# EAGLE board 16x1 8x2 active adapter (EAGLE 4.16)
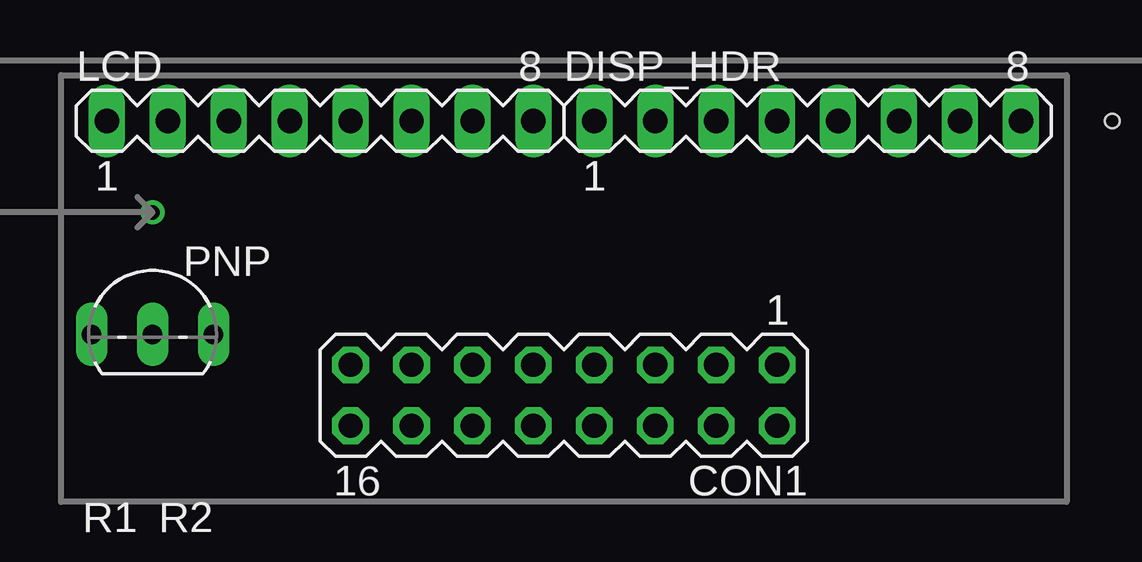
[diagram p0: board, top side]
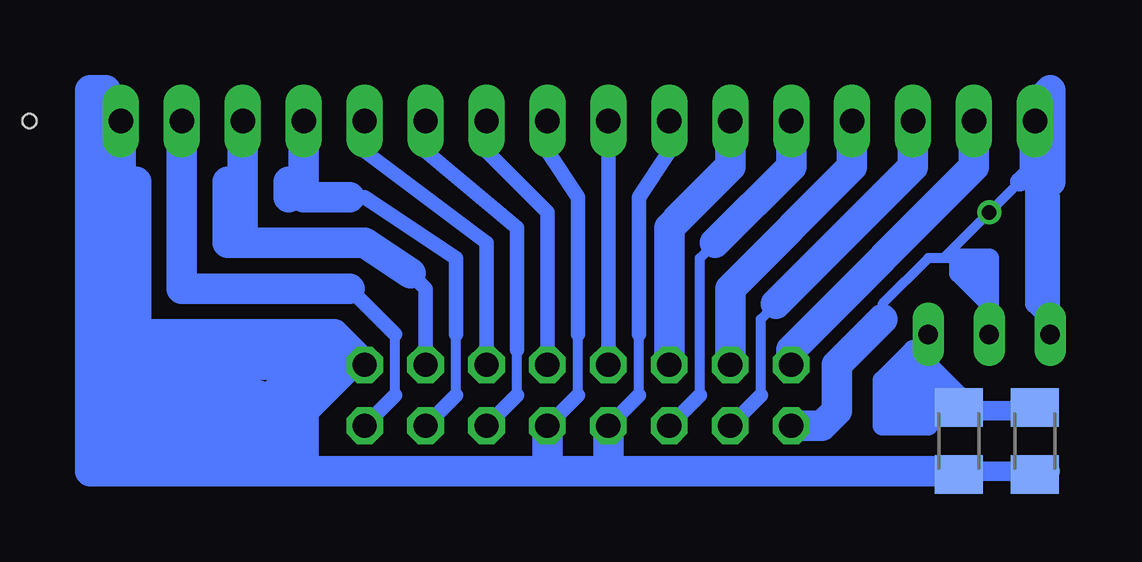
[diagram p1: board, bottom side, seen from below]

No outline drawn. Coordinates in mm, seen from the top.
Copper layers (1*16): Top 0.035mm / dielectric 1.5mm / Bottom 0.035mm
Design rules "default": minimum track width 10mil, minimum drill 24mil, track to track 32mil, track to pad 32mil, pad to pad 32mil, via to via 32mil, smd to smd 32mil, copper to edge 40mil, drill to drill 8mil, minimum pad ring 10mil, minimum via ring 8mil, stop-mask expansion 4mil, vias tented up to drill 0mil, thermal gap 10mil
Holes 0.6 mm at -19.05,48.26 -19.05,21.59 58.42,48.26 58.42,21.59

## Footprints (pad centres in the part's own frame; a part is rotated, then mirrored left to right if it is on the bottom)
MA08-2 = drill 1.016 octagon: 1 -8.89,-1.27; 2 -8.89,1.27; 3 -6.35,-1.27; 4 -6.35,1.27; 5 -3.81,-1.27; 6 -3.81,1.27; 7 -1.27,-1.27; 8 -1.27,1.27; 9 1.27,-1.27; 10 1.27,1.27; 11 3.81,-1.27; 12 3.81,1.27; 13 6.35,-1.27; 14 6.35,1.27; 15 8.89,-1.27; 16 8.89,1.27
MA08-1 = drill 1.016 long: 1 -8.89,0; 2 -6.35,0; 3 -3.81,0; 4 -1.27,0; 5 1.27,0; 6 3.81,0; 7 6.35,0; 8 8.89,0
TO92- = drill 0.813 long: 1 2.54,-1.27; 2 0,-1.27; 3 -2.54,-1.27
M1206 = smd 1.6 x 2: 1 -1.4,0; 2 1.4,0

## Placement (x,y rotation side)
CON1  [MA08-2]  35.56,36.83 180 top
DISP_HDR  [MA08-1]  45.72,48.26 0 top
LCD  [MA08-1]  25.4,48.26 0 top
PNP  E B C  [TO92-]  18.41,40.64 0 top
R1  91  [M1206]  16.51,34.92 270 bottom
R2  91  [M1206]  19.68,34.92 90 bottom

## Library data of the parts
CON1 DISP_HDR LCD = con-lstb
PNP = transistor-pnp
R1 R2 = rcl

## Nets
S$5: PNP.3
S$10: LCD.1 PNP.2
S$18: PNP.1

## Tracks (layer width: path | path; a pad name or v marks a point on that pad's centre or on a via)
S$1
  Bottom 0.406: 35.56,36.83 35.56,39.37 | 33.02,36.83 33.02,39.37
  Bottom 0.61: 35.56,39.37 35.56,45.09 36.83,46.99 36.83,48.26 | 36.83,35.56 35.56,36.83 | 31.75,48.26 31.75,46.99 33.02,45.09 33.02,39.37 | 34.29,35.56 33.02,36.83
  Bottom 0.813: 19.68,33.66 15.88,33.66
  Bottom 1.27: 54.61,48.26 54.61,39.37 45.72,39.37 44.45,38.1 45.09,38.1 46.99,36.2 46.99,33.66 | 36.83,33.66 46.99,33.66 | 34.29,33.66 36.83,33.66 | 34.29,33.66 34.29,35.56 | 46.99,33.66 55.88,33.66 55.88,49.53 55.24,49.53 55.24,38.1 46.99,38.1 | 46.99,38.1 46.35,38.1 | 46.99,38.1 48.26,36.83 48.26,34.29 47.62,34.29 47.62,36.83 45.72,38.73 | 19.68,33.66 34.29,33.66 | 36.83,33.66 36.83,35.56
S$2
  Bottom 0.406: 43.18,36.83 43.18,39.37
  Bottom 0.61: 43.18,39.37 45.09,41.27 | 44.45,35.56 43.18,36.83
  Bottom 1.27: 52.07,48.26 52.07,41.27 45.09,41.27
S$3
  Bottom 0.61: 49.53,48.26 49.53,46.99 | 41.91,38.1 41.91,41.27 42.55,41.91
  Bottom 1.27: 49.53,43.18 49.53,48.26 | 49.53,43.18 44.45,43.18 42.55,41.91 | 50.16,45.72 50.16,43.18 49.53,43.18
S$4
  Bottom 0.61: 34.29,38.1 34.29,48.26
S$5
  Bottom 0.813: 15.88,45.09 PNP.3 15.88,40.01 16.51,40.64 16.51,45.72
S$6
  Bottom 0.406: 36.83,38.73 36.83,38.1
  Bottom 0.61: 39.37,48.26 39.37,46.99 36.83,44.45 36.83,38.73
S$7
  Bottom 0.406: 38.1,36.83 38.1,38.73
  Bottom 0.61: 38.1,38.73 38.1,43.81 41.91,46.99 41.91,48.26 | 39.37,35.56 38.1,36.83
S$8
  Bottom 0.61: 39.37,38.1 39.37,43.18 44.45,46.99 44.45,48.26
S$9
  Bottom 1.27: 48.9,36.83 55.24,36.83 55.24,34.92 48.9,34.92 48.9,35.56 54.61,35.56
S$10  (via drill 0.6)
  Bottom 0.406: LCD.1 15.88,46.35 17.14,45.72 v18.41,44.45 20.32,42.55 | 19.68,42.55 20.32,42.55 | 20.32,42.55 20.95,42.55 22.86,40.64 22.86,40.01
  Bottom 0.813: PNP.2 18.41,40.64 | 18.41,40.64 18.41,41.27 | 18.41,41.27 18.41,42.55 19.68,42.55 19.68,41.91 18.41,40.64 | 17.14,45.72 16.51,46.35 | 19.05,41.91 18.41,41.27
  Bottom 1.27: 26.67,35.56 25.4,35.56 24.77,36.2 24.77,38.1 23.5,39.37 22.86,40.01 | 16.51,48.9 15.88,49.53 15.88,46.35 | LCD.1 16.51,46.35 15.88,46.35 | 15.88,46.35 15.88,45.72
S$11
  Bottom 0.406: 31.75,43.81 31.75,44.45 29.21,46.99 29.21,48.26
  Bottom 1.27: 31.75,38.1 31.75,43.81 29.21,46.35 29.21,48.26
S$12
  Bottom 0.406: 30.48,36.83 30.48,42.55 29.84,43.18
  Bottom 0.61: 31.75,35.56 30.48,36.83
  Bottom 1.27: 26.67,48.26 26.67,46.35 29.84,43.18
S$13
  Bottom 1.27: 29.21,38.1 29.21,41.27 24.13,46.35 24.13,48.26
S$14
  Bottom 0.406: 27.3,40.64 27.94,40.01 27.94,36.83
  Bottom 0.61: 29.21,35.56 27.94,36.83
  Bottom 1.27: 27.3,40.64 21.59,46.35 21.59,48.26
S$15
  Bottom 1.27: 26.67,38.1 26.67,38.73 19.05,46.35 19.05,48.26
S$16
  Bottom 1.27: 53.98,40.01 53.98,45.72
S$17
  Bottom 0.406: 40.64,36.83 40.64,39.37
  Bottom 0.61: 40.64,39.37 40.64,42.55 44.45,45.09 45.09,45.09 | 46.99,48.26 46.99,46.99 | 41.91,35.56 40.64,36.83
  Bottom 1.27: 46.99,48.26 46.99,45.09 45.09,45.09
S$18
  Bottom 0.813: 16.51,36.2 19.68,36.2 19.68,36.83 20.95,38.1 PNP.1
S$19
  Bottom 1.27: 47.62,45.72 47.62,45.09
S$20
  Bottom 0.813: 20.32,36.2 20.95,36.2 20.95,35.56 22.86,35.56 22.86,37.47 21.59,38.73 21.59,38.1 22.23,37.47 22.23,36.2 21.59,36.2 21.59,37.47 20.95,37.47 20.95,36.83

## Text on the board
tDocu: rip up connection by drilling here and solder R1, R2, T1 | to use this board with high current 16x2 LCDs | STANDARD 16x2 | LCD MODULE